# Altium PCB GAN_Synchronous_Buck.PcbDoc
Units mil, origin at the board's own origin, x right, y up, seen from the top; angles counter-clockwise.
Board outline 3937.01 x 2362.2 mil, 2 copper layers (Top Layer, Bottom Layer); 57 components, 22 nets, 161 pads, 193 vias.
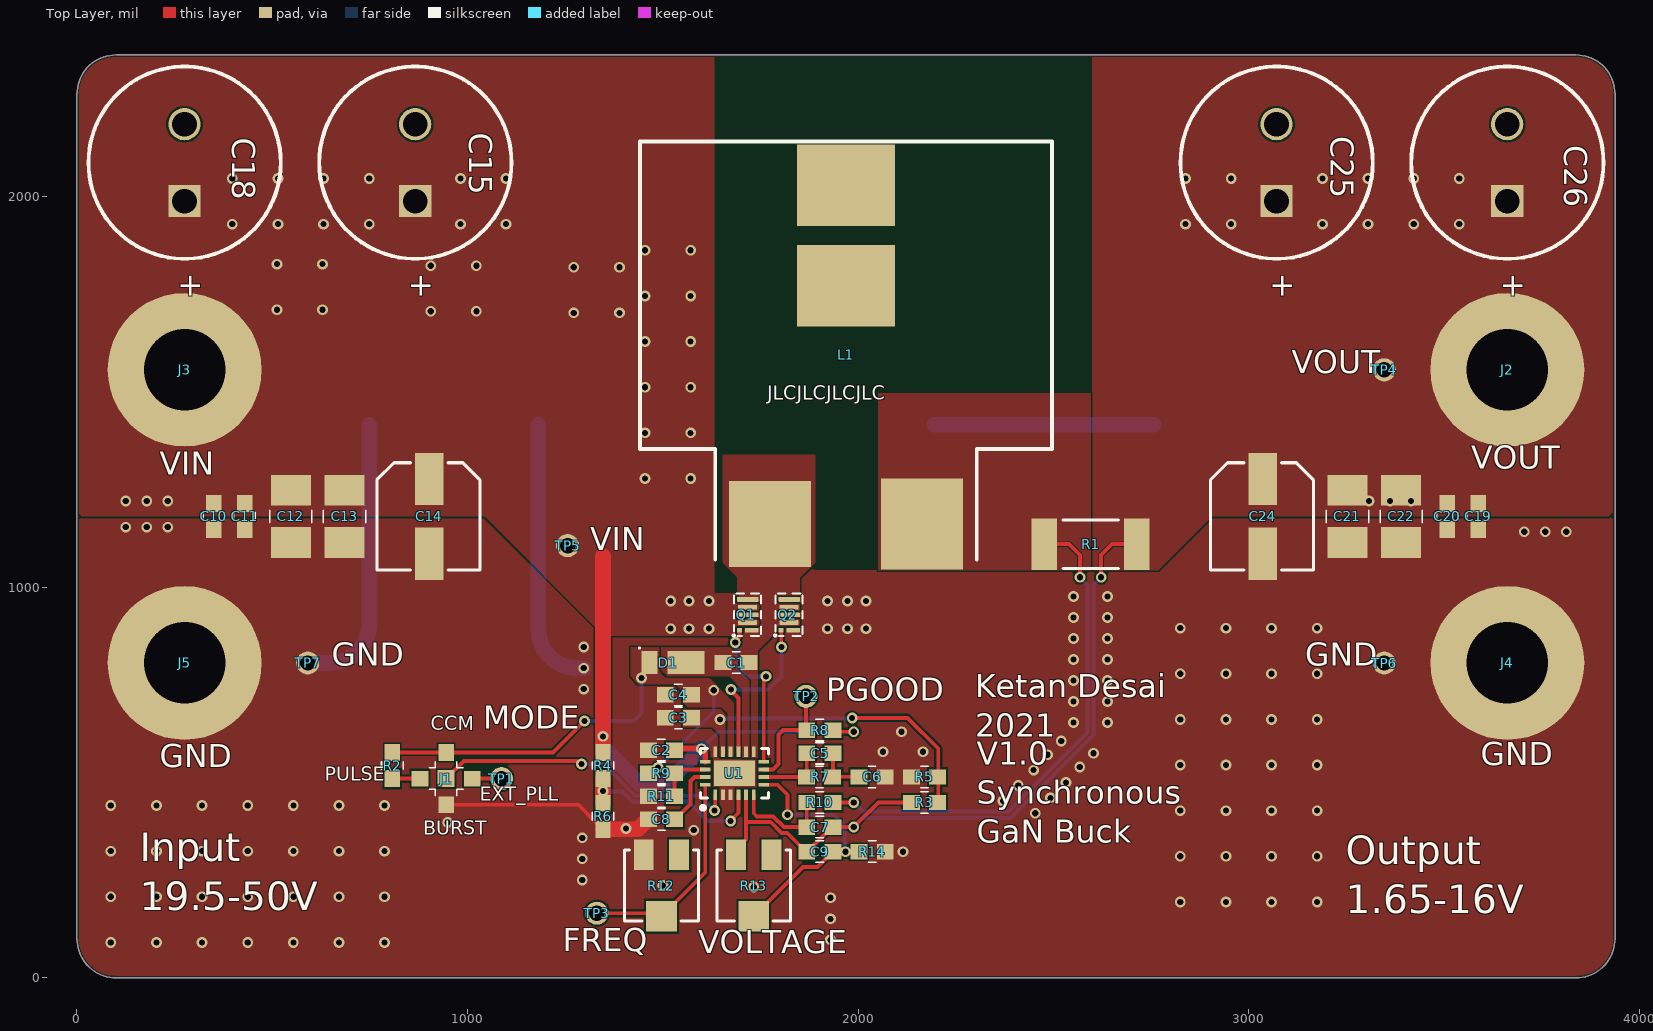
[diagram p0: Top Layer view]
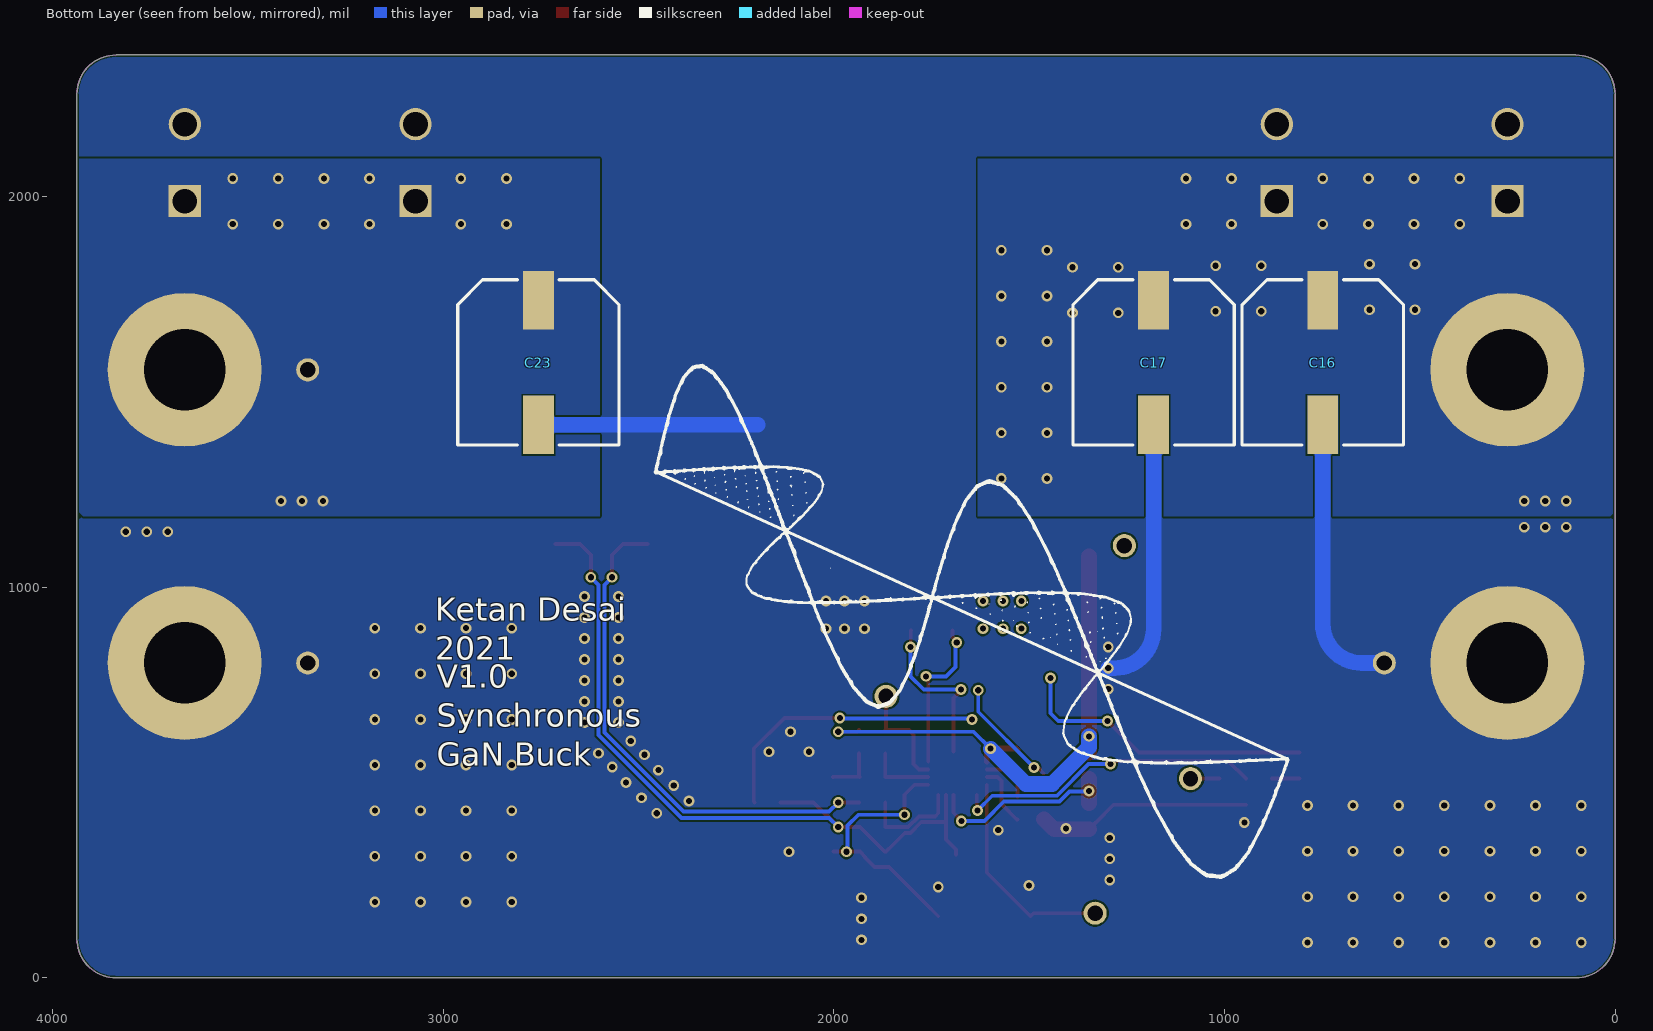
[diagram p1: Bottom Layer view, seen from below]
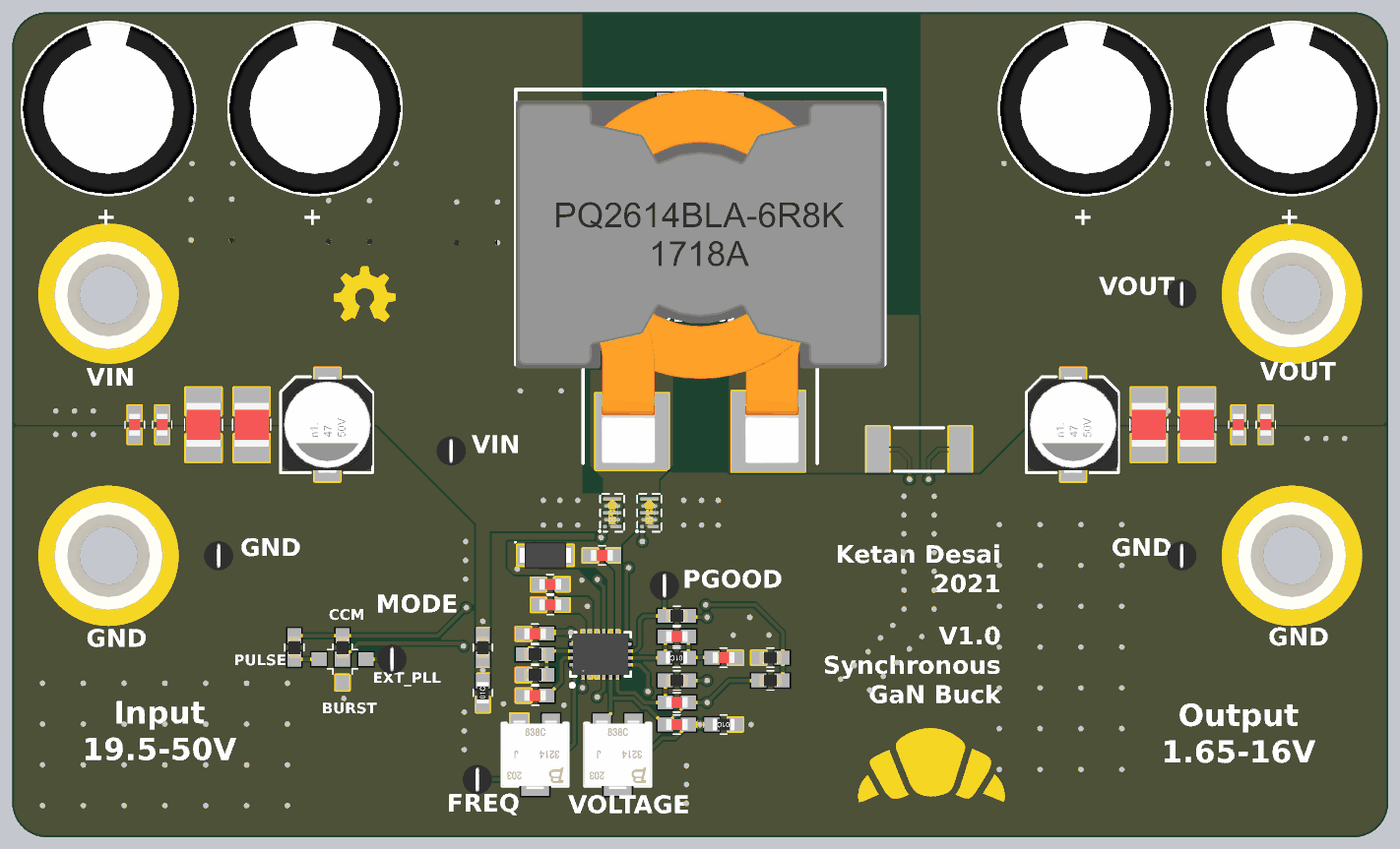
[diagram p2: 3D render of the assembled board from above, using the file's embedded part models]
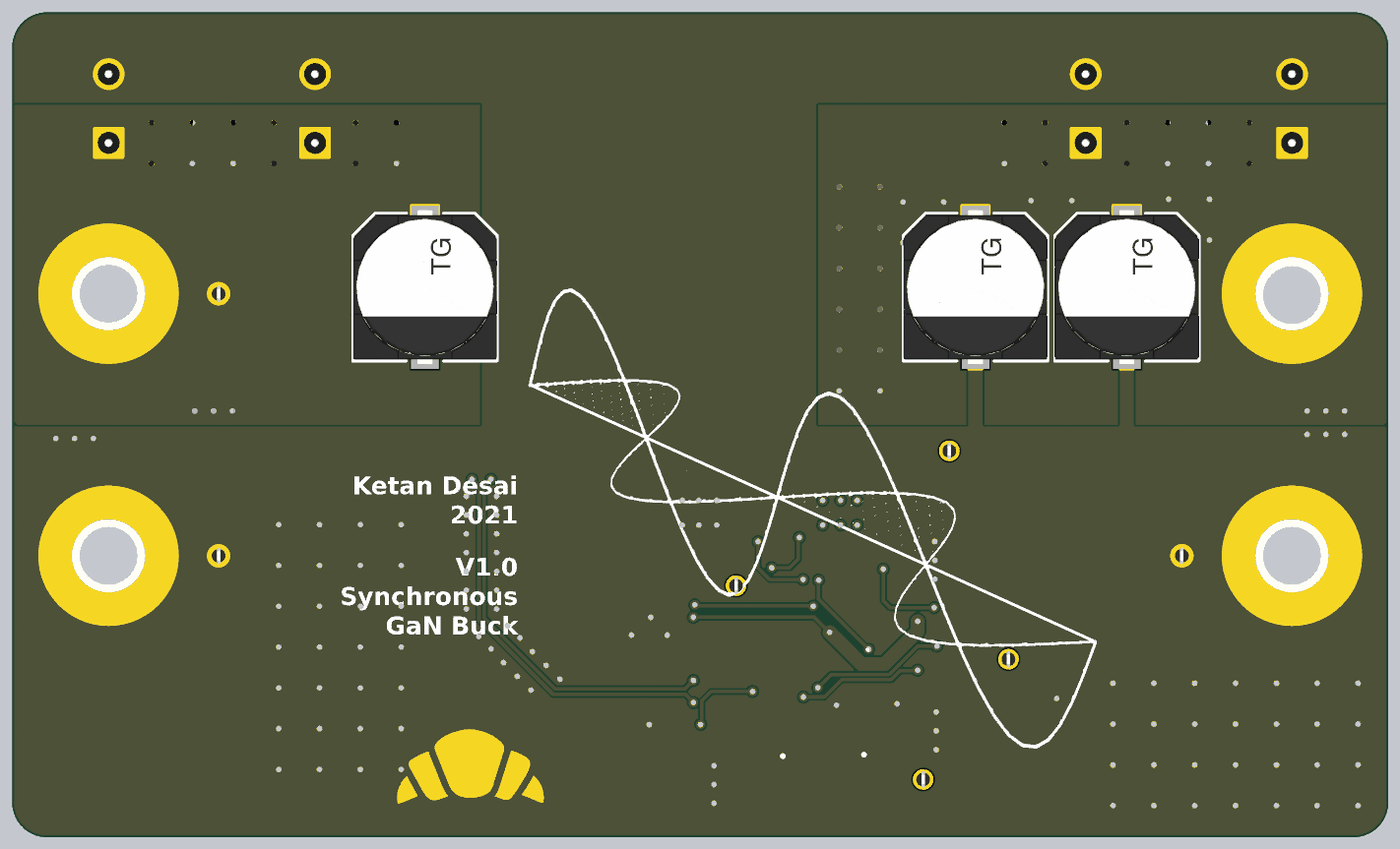
[diagram p3: 3D render of the assembled board from below, using the file's embedded part models]

## Layer stack, top to bottom
Top Solder: solder mask 0.4, Solder Resist, Dk 3.5
Top Layer: signal copper 1.4
Dielectric 1: dielectric 12.6, FR-4, Dk 4.8
Bottom Layer: signal copper 1.4
Bottom Solder: solder mask 0.4, Solder Resist, Dk 3.5

## Board outline
3937.01,2262.2 ccw(c3837.01,2262.2) 3837.01,2362.2 100,2362.2 ccw(c100,2262.2) 0,2262.2 0,100 ccw(c100,100) 100,0 3837.01,0 ccw(c3837.01,100) 3937.01,100

## Design rules (kind name [scope] priority, off if disabled: settings)
Clearance [All] p1: gap=5 ignorepadtopadclearanceinfootprint=FALSE
PlaneClearance [All] p1: clearance=30
PolygonConnect PolygonConnect_5 [All vs IsNamedPolygon('NONET_L-01_P-001')] p1: connectstyle=Direct reliefconductorwidth=15 reliefentries=4 polygonreliefangle="90 Angle" airgapwidth=10
PolygonConnect PolygonConnect_4 [All vs IsNamedPolygon('NONET_L-01_P-001')] p2: connectstyle=Direct reliefconductorwidth=25 reliefentries=4 polygonreliefangle="90 Angle" airgapwidth=10
PolygonConnect PolygonConnect_3 [All vs IsNamedPolygon('NONET_L-01_P-001')] p3: connectstyle=Direct reliefconductorwidth=10 reliefentries=4 polygonreliefangle="90 Angle" airgapwidth=10
PolygonConnect PolygonConnect_2 [All vs IsNamedPolygon('NONET_L-01_P-001')] p4: connectstyle=Direct reliefconductorwidth=10 reliefentries=4 polygonreliefangle="90 Angle" airgapwidth=10
PolygonConnect PolygonConnect_1 [All vs IsNamedPolygon('NONET_L-01_P-001')] p5: connectstyle=Direct reliefconductorwidth=10 reliefentries=4 polygonreliefangle="90 Angle" airgapwidth=10
PolygonConnect [All] p6: connectstyle=Direct reliefconductorwidth=10 reliefentries=4 polygonreliefangle="90 Angle" airgapwidth=10
RoutingVias [All] p1: holewidth=20.12 width=39.37 viastyle="Through Hole" minholewidth=15.75 minwidth=27.56 maxholewidth=27.99 maxwidth=50
SolderMaskExpansion [All] p1: expansion=4 istentingtop=FALSE
Width [All] p1: maxlimit=40 minlimit=5 preferedwidth=10
29 further rules are at their usual default settings.

## Components (designator, comment, footprint, x,y, rotation, side; value= is the part's Value field where it differs from the comment)
C1 "C0603 100nF 50V X7R" C0603-IPC 1687.01,807.09 r0 top value=100nF
C2 "C0603 100nF 50V X7R" C0603-IPC 1496.06,582.68 r180 top value=100nF
C3 "C0603 1uF 50V X7R" C0603-IPC 1539.37,665.35 r0 top value=1uF
C4 "C0603 1uF 50V X7R" C0603-IPC 1539.37,724.41 r180 top value=1uF
C5 "C0603 330pF 50V C0G" C0603-IPC 1901.57,574.8 r180 top value=330pF
C6 "C0603 4.7nF 50V X7R" C0603-IPC 2035.43,514.02 r180 top value=4.7nF
C7 "C0603 3.6nF 50V C0G" C0603-IPC 1901.57,385.83 r180 top value=3.6nF
C8 "C0603 100nF 50V X7R" C0603-IPC 1496.06,405.51 r0 top value=100nF
C9 "C0603 22pF 50V C0G" C0603-IPC 1901.57,322.83 r180 top value=22pF
C10 "C0603 1uF 50V X7R" C0603-IPC 350.39,1181.1 r90 top value=1uF
C11 "C0603 1uF 50V X7R" C0603-IPC 429.13,1181.1 r90 top value=1uF
C12 "C1210 10uF 75V X5R" C1210-IPC 547.24,1181.1 r90 top value=10uF
C13 "C1210 10uF 75V X5R" C1210-IPC 685.04,1181.1 r90 top value=10uF
C14 "UUR1H470MCL6GS" C-SMD-Polarized-6.3x7.7mm 901.57,1181.1 r270 top value=47uF
C15 "35ZLH1000MEFC12.5X20" C-POLARIZED-5-12.5 866.14,2086.61 r270 top value=150uF
C16 "PCE3675CT-ND" C-SMD-Polarized-10x10.2mm 748.03,1574.8 r270 bottom value=33uF
C17 "PCE3675CT-ND" C-SMD-Polarized-10x10.2mm 1181.1,1574.8 r270 bottom value=33uF
C18 "35ZLH1000MEFC12.5X20" C-POLARIZED-5-12.5 275.59,2086.61 r270 top value=560uF
C19 "C0603 1uF 50V X7R" C0603-IPC 3586.61,1181.1 r90 top value=1uF
C20 "C0603 1uF 50V X7R" C0603-IPC 3507.87,1181.1 r90 top value=1uF
C21 "C1210 10uF 75V X5R" C1210-IPC 3251.97,1181.1 r90 top value=10uF
C22 "C1210 10uF 75V X5R" C1210-IPC 3389.76,1181.1 r90 top value=10uF
C23 "PCE3675CT-ND" C-SMD-Polarized-10x10.2mm 2755.91,1574.8 r270 bottom value=33uF
C24 "UUR1H470MCL6GS" C-SMD-Polarized-6.3x7.7mm 3035.43,1181.1 r270 top value=47uF
C25 "35ZLH1000MEFC12.5X20" C-POLARIZED-5-12.5 3070.87,2086.61 r270 top value=150uF
C26 "35ZLH1000MEFC12.5X20" C-POLARIZED-5-12.5 3661.42,2086.61 r270 top value=560uF
D1 "DFLS2100Q-7" "POWERDI 123" 1525.59,807.09 r0 top
J1 "MODE" "4P Jumper" 944.88,509.84 r0 top
J2 "VOUT" "Banana Jack"#1 3661.42,1556.3 r180 top
J3 "VIN" "Banana Jack"#2 275.59,1552.36 r180 top
J4 "GND" "Banana Jack"#1 3661.42,805.91 r180 top
J5 "GND" "Banana Jack"#1 275.59,805.91 r180 top
L1 "PQ2614BLA-6R8K" "PQ2614BLA/BHA Bourns" 1968.5,1726.57 r0 top locked value=6.8uH
Q1 "EPC2055" D0133CT44M 1716.55,929.15 r90 top locked
Q2 "EPC2055" D0133CT44M 1822.87,929.14 r90 top locked
R1 "ERJ-M1WTF1M5U" R2512-IPC 2594.49,1110.24 r0 top value=0R0015
R2 "R0603 100K 1%" R0603-IPC 807.09,543.31 r90 top value=100k
R3 "R0603 0" R0603-IPC 2169.29,448.82 r180 top value=0
R4 "R0603 100K 1%" R0603-IPC 1346.46,543.31 r90 top value=100k
R5 "R0603 0" R0603-IPC 2169.29,514.02 r0 top value=0
R6 "R0603 10K 1%" R0603-IPC-10K 1346.46,413.39 r90 top value=10k
R7 "R0603 10K 1%" R0603-IPC-10K 1900.98,514.02 r180 top value=10k
R8 "R0603 100K 1%" R0603-IPC 1901.57,633.86 r0 top value=100k
R9 "R0603 0" R0603-IPC 1496.06,523.62 r180 top value=0
R10 "R0603 210R 1%" R0603-IPC 1901.57,448.82 r180 top value=210
R11 "R0603 0" R0603-IPC 1496.06,464.57 r0 top value=0
R12 "FREQ" POT4.8-3.5 1496.06,236.22 r270 top value=100k
R13 "VOLTAGE" POT4.8-3.5 1732.28,236.22 r270 top value=200k
R14 "R0603 10K 1%" R0603-IPC-10K 2035.43,322.83 r180 top value=10k
TP1 "EXT_PLL" Testpoint_TH 1086.61,509.84 r180 top
TP2 "PGOOD" Testpoint_TH 1866.14,720.47 r180 top
TP3 "FREQ" Testpoint_TH 1330.71,165.35 r180 top
TP4 "VOUT" Testpoint_TH 3346.46,1556.3 r180 top
TP5 "VIN" Testpoint_TH 1255.91,1106.3 r180 top
TP6 "GND" Testpoint_TH 3346.46,805.75 r180 top
TP7 "GND" Testpoint_TH 590.55,805.91 r180 top
U1 "LTC7800EUDC#PBF" "QFN20 - 3x4MM - ADI" 1683.07,523.62 r90 top locked

## Footprints (in the part's own frame and the unit in brackets; to place one, negate y for a bottom-side part, rotate by r counter-clockwise, add the part's x,y. Pads: shape width x height; smd on the part's side, far side on the other; paste and mask are expansions set on the pad)
"4P Jumper" [mm] "0603 4 Position Jumper"
  rect 1x1.1 smd: 1(0,1.7) 3(0,-1.7)
  rect 1.1x1 smd: 2(1.7,0) 4(-1.7,0)
  rect 1.1x1.1 smd: 5(0,0)
  silkscreen extent -1.1,-1.1 1.1,1.1, body extent -0.43,0.07 0.43,1.62, height 0.44
"Banana Jack"#1 [mm] "JACK NON-INSULATED .350\""
  round 10 hole 5.3: 1(0,0)
  body extent -3.96,-3.96 3.96,3.96, height 2.37
"Banana Jack"#2 [mm] "JACK NON-INSULATED .350\""
  round 10 hole 5.3: 1(0,-0.1)
  body extent -3.96,-3.96 3.96,3.96, height 2.37
C0603-IPC [mm]
  rect 1.1x1 smd: 1(-0.85,0) 2(0.85,0)
  silkscreen extent -0.24,-0.7 0.26,0.7, body extent -0.8,-0.4 0.8,0.4, height 0.3
C1210-IPC [mm] "Chip Capacitor, Body 3.2x2.5mm, IPC High Density"
  rect 2x2.6 smd: 1(-1.7,0) 2(1.7,0)
  silkscreen extent -0.4,-1.38 0.4,1.38, body extent -1.6,-1.25 1.6,1.25, height 0.92
C-POLARIZED-5-12.5 [mm] "Through-hole Capacitor"
  rect 2.1x2.1 hole 1.6: 1(2.5,-0.012)
  round 2.1 hole 1.6: 2(-2.5,-0.012)
  silkscreen extent -6.25,-6.25 6.25,6.25, body extent -6.25,-6.25 6.25,6.25, height 20.1
C-SMD-Polarized-6.3x7.7mm [mm] "Aluminum Electrolytic Capacitor, Body 2.20x6.60x7.70mm, IPC Low Density"
  rect 3.4x1.85 smd: 1(-2.425,0) 2(2.425,0)
  silkscreen extent -3.49,-3.4 3.49,3.29, body extent -3.5,-3.3 3.5,3.3, height 7.7
C-SMD-Polarized-10x10.2mm [mm] "Aluminum Electrolytic Capacitor, IPC Low Density"
  rect 3.8x2 smd: 1(-4.05,0) 2(4.05,0)
  silkscreen extent -5.39,-5.25 5.37,5.25, body extent -5.6,-5.25 5.6,5.24, height 10.54
D0133CT44M [mm] "EPC2055/EPC2204"
  rrect30% 0.301x0.351 smd paste-0.2 mask-0.2: 1(-1,0.525)
  rrect30% 0.301x0.876 smd paste-0.2 mask-0.2: 2(-1,-0.262)
  rrect30% 0.301x1.226 smd paste-0.2 mask-0.2: 3(-0.5,0) 5(0.5,0)
  rrect30% 0.301x1.401 smd paste-0.2 mask-0.2: 4(0,0) 6(1,0)
  rrect50% 0.23x0.805 on Top Solder mask-0.2: ""(-1,-0.262)
  rrect50% 0.23x0.28 on Top Solder mask-0.2: ""(-1,0.525)
  rrect50% 0.23x0.805 on Top Paste mask-0.2: ""(-1,-0.261)
  rrect50% 0.23x0.28 on Top Paste mask-0.2: ""(-1,0.526)
  rrect50% 0.23x1.155 on Top Solder mask-0.2: ""(-0.5,0) ""(0.5,0)
  rrect50% 0.21x1.155 on Top Paste mask-0.2: ""(-0.5,0.001) ""(0.5,0.001)
  rrect50% 0.23x1.33 on Top Solder mask-0.2: ""(0,0) ""(1,0)
  rrect50% 0.21x1.33 on Top Paste mask-0.2: ""(0,0.001) ""(1,0.001)
  silkscreen extent -1.38,-0.87 1.38,0.91, body extent -1.25,-0.75 1.25,0.75, height 0.65
POT4.8-3.5 [mm] "Surface Mount Potentiometer"
  rect 2x1.3 smd: 1(-2,-1.15) 3(-2,1.15)
  rect 2x2 smd: 2(2,0)
  silkscreen extent -2.3,-2.4 2.3,2.4, body extent -2.48,-2.41 2.48,2.41, height 3.72
"POWERDI 123" [mm] "SODFL, 2-Leads, Body 1.78x3.70mm, IPC Low Density"
  rect 2.4x1.5 smd: 1(0.85,0)
  rect 1.05x1.5 smd: 2(-1.525,0)
  silkscreen extent -2.22,0.9 -2.12,1, body extent -1.85,-0.96 1.85,0.96, height 1
"PQ2614BLA/BHA Bourns" [mm] "Bourns PQ2614 Power Inductors"
  rect 5.33x5.59 smd: 1(-4.95,-14.355)
  rect 5.33x5.9 smd: 2(4.95,-14.355)
  rect 6.35x5.28 smd: 3(0,7.68)
  silkscreen extent -13.4,-16.65 13.4,10.53, body extent -13.4,-16.65 13.4,10.52, height 15
"QFN20 - 3x4MM - ADI" [mm] "Analog 20-WFQFN LTC7800"
  rect 0.7x0.25 smd: 1(-1.4,1.25) 2(-1.4,0.75) 3(-1.4,0.25) 4(-1.4,-0.25) 5(-1.4,-0.75) 6(-1.4,-1.25) 11(1.4,-1.25) 12(1.4,-0.75) 13(1.4,-0.25) 14(1.4,0.25) 15(1.4,0.75) 16(1.4,1.25)
  rect 0.25x0.7 smd: 7(-0.75,-1.9) 8(-0.25,-1.9) 9(0.25,-1.9) 10(0.75,-1.9) 17(0.75,1.9) 18(0.25,1.9) 19(-0.25,1.9) 20(-0.75,1.9)
  rect 1.65x2.65 smd: 21(0,0)
  silkscreen extent -2.37,-2.2 1.6,2.2, body extent -1.5,-2 1.5,2, height 0.75
R0603-IPC [mm]
  rect 1.1x1 smd: 1(-0.85,0) 2(0.85,0)
  silkscreen extent -0.25,-0.7 0.25,0.7, body extent -0.77,-0.43 0.78,0.43, height 0.44
R0603-IPC-10K [mm] "10K 0603 Resistor"
  rect 1.1x1 smd: 1(-0.85,0) 2(0.85,0)
  silkscreen extent -0.25,-0.7 0.25,0.7, body extent -0.77,-0.43 0.78,0.43, height 0.44
R2512-IPC [mm] "Chip Resistor, 2-Leads, Body 6.35x3.10mm, IPC Low Density"
  rect 1.65x3.35 smd: 1(-3,0) 2(3,0)
  silkscreen extent -1.8,-1.58 1.8,1.58, body extent -3.27,-1.63 3.27,1.63, height 0.7
Testpoint_TH [mm]
  round 1.5 hole 1: 1(0,0)
  body extent -1.07,-1.07 1.07,1.06, height 4.57

## Part data
C1 C2 C8: "CAP CER 0.1UF 50V X7R 0603", Max. Voltage=50V, Ratings=AEC-Q200, Supplier Part Number 1=490-5798-1-ND, EIA Code=X7R, Features="Soft Termination", Supplier 1=Digi-Key
C3 C4 C10 C11 C19 C20: "CAP CER 1UF 50V X7R 0603", Max. Voltage=50V, EIA Code=X7R
C5: "CAP CER 330PF 50V C0G/NP0 0603", Max. Voltage=50V, EIA Code=C0G
C6: "CAP CER 4700PF 50V X7R 0603", Max. Voltage=50V, Supplier Part Number 1=1276-2066-1-ND, EIA Code=X7R, Features="Soft Termination", Supplier 1=Digi-Key
C7: "Chip Capacitor, 0603, 3.6nF, 50V, X7R", Max. Voltage=50V, Supplier Part Number 1=490-6386-1-ND, EIA Code=C0G, Supplier 1=Digi-Key
C9: "CAP CER 22PF 50V C0G/NP0 0603", Max. Voltage=50V, Supplier Part Number 1=732-7795-1-ND, EIA Code=C0G, Supplier 1=Digi-Key
C12 C13 C21 C22: library part "C1210 10uF 16V X5R", "Chip Capacitor, 1210, 10uF, 75V, X5R", Max. Voltage=75V, Supplier Part Number 1=587-1376-1-ND, EIA Code=X5R, Supplier 1=Digi-Key
C14 C24: library part "C-SMD 47uF 50V Electrolytic", "47uF ±20% 50V SMD,6.3x7.7mm Aluminum Electrolytic Capacitors - SMD", Supplier Part Number 1=493-6230-1-ND, Supplier 1=Digi-Key, Supplier 2=Mouser, Supplier 3=LCSC, Supplier Part Number 2=647-UUR1H470MCL6GS, Supplier Part Number 3=C445227
C15 C18 C25 C26: library part "C-THT 1000uF 35V Electrolytic", "1000uF ±20% 35V 12.5x20 10000Hrs @ 105℃ Radial,12.5x20mm Aluminum Electrolytic Capacitors - Leaded RoHS", Supplier Part Number 1=1189-1888-ND, Supplier 1=Digi-Key, Supplier 2=Mouser, Supplier 3=LCSC, Supplier Part Number 2=232-LH1000MEFC125X20, Supplier Part Number 3=C338194
C16 C17 C23: library part "C-SMD 33uF 80V Electrolytic", "33 µF 80 V Aluminum Electrolytic Capacitors Radial, Can - SMD 1Ohm @ 100kHz 2000 Hrs @ 125°C", Voltage=80V, Supplier 1=Digi-Key, Supplier 2=Mouser, Supplier Part Number 1=PCE3675CT-ND, Supplier Part Number 2=667-EEV-TG1K330P
D1: library part DFLS1100-7, "DIODE SCHOTTKY 100V POWERDI123", Current - Average Rectified (Io)=1A, Current - Reverse Leakage @ Vr="1µA @ 100V", Supplier Part Number 1=DFLS1100DICT-ND, Voltage - DC Reverse (Vr) (Max)=100V, Voltage - Forward (Vf) (Max) @ If="770mV @ 1A", Diode Type=Schottky, Supplier 1=Digi-Key
J1: library part "4P Jumper", "0603 4 Way Solder Jumper"
J2 J3 J4 J5: library part "Banana Jack", "JACK NON-INSULATED .350\"", Supplier Part Number 1=36-575-8-ND, Supplier 1=Digi-Key
L1: library part "Bourns PQ2614BLA-6R8K", "FIXED IND 6.8UH 30A 1.6 MOHM SMD", Saturation Current=26A, Supplier Part Number 1=PQ2614BLA-6R8K-ND, Supplier 1=Digi-Key, Supplier 2=Mouser, Supplier Part Number 2=652-PQ2614BLA-6R8K
Q1 Q2: "GANFET N-CH 40V 29A 3.6mOhm", Supplier Part Number 1=917-EPC2055CT-ND, MFG=EPC, MFGPN=EPC2055, QSGdescript="40V 29A 3.6mE", SchDescript="40V 29A 3.6mE", Supplier 1=Digi-Key
R1: library part "R0805 0R0015 1%", "RES SHUNT, 2512, 0.0015 OHM, 1%,", Supplier Part Number 1=P1.5NDCT-ND, Supplier 1=Digi-Key, Supplier 2=Mouser, Supplier Part Number 2=667-ERJ-M1WTF1M5U
R2 R4 R8: "RES SMD 100K OHM 1% 1/10W 0603", Supplier Part Number 1=RMCF0603FT100KCT-ND, Supplier 1=Digi-Key
R3 R5 R9 R11: "RES SMD 0 OHM JUMPER 1/10W 0603", Supplier Part Number 1=RMCF0603ZT0R00CT-ND, Supplier 1=Digi-Key
R6 R7 R14: "RES SMD 10K OHM 1% 1/10W 0603", Supplier Part Number 1=RMCF0603FT10K0CT-ND, Supplier 1=Digi-Key
R10: "RES 210 OHM 1% 1/10W 0603", Supplier Part Number 1=RMCF0603FT210RCT-ND, Supplier 1=Digi-Key
R12 R13: library part "Trimmer 200k", "200 kOhms 0.25W, 1/4W J Lead Surface Mount Trimmer Potentiometer Cermet 5.0 Turn Side Adjustment", Supplier Part Number 1=3214J-1-204ECT-ND, Supplier 1=Digi-Key, Supplier 2=Mouser, Supplier Part Number 2=652-3214J-1-204E
TP1 TP2 TP3 TP4 TP5 TP6 TP7: library part Testpoint_TH, "Through-hole testpoint hook"
U1: library part LTC7800EUDC, "Synchrnous Buck Regulator Positive Output Step-Down - DC-DC Controller IC 20-QFN (3x4)", Supplier Part Number 1=LTC7800EUDC#PBF-ND, Supplier 1=Digi-Key, Supplier 2=Mouser, Supplier Part Number 2=584-LTC7800EUDCPBF

## Free pads (board coordinates)
  rect 250x207.87 smd: 3(1968.5,1771.65)

## Via types
v1: diameter 27.56, hole 15.75, Top Layer to Bottom Layer, tented both sides, 193 vias

## Nets (pads, with @x,y where several pads share a name; then routed paths per layer and width w, separated by ;. In a path a pad name is that pad's centre, name@x,y a point inside that pad or via, vN(x,y) a via of type N, cw(c..) or ccw(c..) an arc to the next point about the centre after c; other vN are vias at no path point)
BOOST: C1.1 D1.1 U1.12
FREQ: R12.2 TP3.1 U1.20 | length 551.7
  Top Layer w10: TP3.1 1488.19,165.35 R12.2 1608.27,269.69 U1.20
ILIM: R9.1 R11.2 U1.18 | length 141.9
  Top Layer w10: R11.2 R9.1 1539.37,533.46 U1.18
INTVCC: C4.1 D1.2 J1.1 R2.2 R9.2 U1.14 | length 1057.6
  Top Layer w10: R2.2 J1.1 1218.5,576.77 v1(1299.21,657.48) ; R9.2 1477.28,538.31 v1(1487.13,538.31)
  Bottom Layer w10: v1(1299.21,657.48) 1425.2,657.48 1444.88,677.17 v1(1444.88,767.72) ; v1(1487.13,538.31) 1629.92,681.1 v1(1629.92,736.22)
NetC3_2: C3.2 R3.1 R5.2 U1.15 | length 731.9
  Top Layer w10: v1(1984.25,665.35) 2125.98,665.35 2204.72,586.61 2204.72,450.79 R3.1
  Bottom Layer w10: v1(1645.67,661.42) 1647.64,663.39 1982.28,663.39 v1(1984.25,665.35)
NetC5_1: C5.1 C6.2 R7.1 | length 128.2
  Top Layer w10: R7.1 R7.1@1935.04,514.61 ; C5.1 R7.1@1935.04,514.61 ; C6.2 2001.38,514.61 R7.1@1935.04,514.61
NetC5_2: C5.2 R7.2 U1.8 | length 170.8
  Top Layer w10: U1.8 1867.28,513.78 R7.2 1868.11,514.61 C5.2
NetC7_2: C7.2 R10.2 U1.6 | length 260.7
  Top Layer w10: U1.6 1732.28,421.26 1740.16,413.39 1782.03,413.39 1809.59,385.83 C7.2 R10.2
NetC8_2: C8.2 U1.19 | length 158.2
  Top Layer w10: C8.2 1531.5,405.51 1570.87,444.88 1570.87,503.94 1580.71,513.78 U1.19
NetC9_1: C9.1 R13.2 R14.2 U1.7 | length 685.4
  Top Layer w10: R13.2 1766.65,191.85 1826.77,251.97 1858.27,283.46 1895.67,283.46 1918.39,306.18 1918.39,308.15 1933.07,322.83 v1(1967.52,322.83) R14.2@2000,322.83 ; U1.7 1793.31,494.09 1818.9,468.5 v1(1818.9,417.32)
  Bottom Layer w10: v1(1818.9,417.32) 1937.01,417.32 1964.41,389.92 1964.41,325.94 v1(1967.52,322.83)
NetJ1_2: J1.2 TP1.1 | length 74.8
  Top Layer w10: J1.2 TP1.1
NetJ1_4: J1.4 R2.1 | length 70.9
  Top Layer w10: R2.1 J1.4
NetJ1_5: J1.5 U1.1 | length 799.7
  Top Layer w10: J1.5 990.16,555.12 1278.71,555.12 1286.59,547.24 v1(1291.34,547.24) ; v1(1632.05,428.08) 1633.86,429.89 U1.1
  Bottom Layer w10: v1(1291.34,547.24) 1347.34,547.24 1428.52,466.06 1594.06,466.06 v1(1632.05,428.08)
NetQ1_1: Q1.1 U1.10 | length 406.1
  Top Layer w10: v1(1685.04,858.27) 1685.04,861.41 1695.87,872.24 Q1.1 ; U1.10 1757.87,761 1763.78,766.9 v1(1763.78,771.65)
  Bottom Layer w10: v1(1685.04,858.27) 1688.4,854.91 1688.4,795.85 1712.6,771.65 v1(1763.78,771.65)
NetQ2_1: Q2.1 U1.13 | length 428.5
  Top Layer w10: v1(1674.18,738.08) 1674.18,734.85 1692.91,716.11 U1.13 ; Q2.1 1802.67,889.27 1802.67,846.94 v1(1803.15,846.46)
  Bottom Layer w10: v1(1674.18,738.08) 1769.57,738.08 1803.15,771.65 v1(1803.15,846.46)
NetR4_1: R4.1 R6.2 U1.4 | length 496.6
  Top Layer w10: v1(1673.23,401.57) 1673.23,402.9 1692.91,422.59 U1.4
  Top Layer w40: R6.2 v1(1346.46,478.35) R4.1
  Bottom Layer w10: v1(1346.46,478.35) 1347.95,476.85 1396.51,476.85 1422.31,451.06 1564.69,451.06 1614.17,401.57 v1(1673.23,401.57)
PGND: C2.2 C3.1 C4.2 C6.1 C8.1 C10.1 C11.1 C12.1 C13.1 C14.2 C15.2 C16.2 C17.2 C18.2 C19.1 C20.1 C21.1 C22.1 C23.2 C24.2 C25.2 C26.2 J1.3 J4.1 J5.1 Q2.2 Q2.4 Q2.6 R5.1 R6.1 R11.1 R12.1 R14.1 TP6.1 TP7.1 U1.2 U1.3 U1.16 U1.21 | length 2536.5
  Top Layer w10: J1.3 1283.46,442.91 1329.8,396.57 1331.77,396.57 1346.46,381.89 R6.1
  Top Layer w40: R6.1 1435.67,379.92 1461.26,405.51 C8.1
  Bottom Layer w40: TP7.1 648.03,805.91 ccw(c648.03,905.91) 748.03,905.91 C16.2 ; C17.2 1181.1,892.65 ccw(c1281.1,892.65) 1281.1,792.65 v1(1297.24,792.65) ; 2194.88,1415.35 C23.2
  other v1: 86.61,90.55 203.41,90.55 320.21,90.55 437.01,90.55 553.8,90.55 670.6,90.55 787.4,90.55 1929.13,97.11 1929.13,150.92 2824.15,194.23 2940.94,194.23 3057.74,194.23 3174.54,194.23 1929.13,204.72 86.61,207.35 203.41,207.35 320.21,207.35 437.01,207.35 553.8,207.35 670.6,207.35 787.4,207.35 1732.28,232.28 1500,236.22 1293.31,250.66 1293.31,304.46 2824.15,311.02 2940.94,311.02 3057.74,311.02 3174.54,311.02 2114.17,322.83 86.61,324.15 203.41,324.15 320.21,324.15 437.01,324.15 553.8,324.15 670.6,324.15 787.4,324.15 1293.31,358.27 1578.74,377.95 1405.51,381.89 948.82,397.64 2452.76,421.26 2824.15,427.82 2940.94,427.82 3057.74,427.82 3174.54,427.82 86.61,440.94 203.41,440.94 320.21,440.94 437.01,440.94 553.8,440.94 670.6,440.94 787.4,440.94 2370.08,452.76 2492.13,460.63 2409.45,492.13 2531.5,500 2448.82,531.5 2566.93,539.37 2824.15,544.62 2940.94,544.62 3057.74,544.62 3174.54,544.62 2484.25,570.87 2602.36,574.8 2062.99,578.74 2165.35,578.74 2519.68,606.3 2110.24,629.92 2551.18,653.54 2637.8,653.54 2824.15,661.42 2940.94,661.42 3057.74,661.42 3174.54,661.42 2551.18,707.35 2637.8,707.35 1297.24,738.85 2551.18,761.15 2637.8,761.15 2824.15,778.22 2940.94,778.22 3057.74,778.22 3174.54,778.22 2551.18,814.96 2637.8,814.96 1297.24,846.46 2551.18,868.77 2637.8,868.77 1921.26,893.7 1972.44,893.7 2019.68,893.7 2824.15,895.01 2940.94,895.01 3057.74,895.01 3174.54,895.01 2551.18,922.57 2637.8,922.57 1921.26,964.57 1972.44,964.57 2019.68,964.57 2551.18,976.38 2637.8,976.38 3704.72,1141.73 3758.53,1141.73 3812.34,1141.73 124.67,1153.54 178.48,1153.54 232.28,1153.54
PGOOD: R8.1 TP2.1 U1.9 | length 296.6
  Top Layer w10: U1.9 1781.5,533.46 1795.28,547.24 1795.28,622.05 1807.09,633.86 R8.1 1866.14,635.83 TP2.1 TP2.1@1866.14,734.01
SENSE+: L1.2 R1.1 R10.1 | length 1310.4
  Top Layer w10: R10.1 v1(1988.19,448.82) ; R1.1 2539.37,1110.24 2567.34,1082.26 v1(2567.34,1025.25)
  Bottom Layer w10: v1(1988.19,448.82) 2011.81,425.2 2384.3,425.2 2586.61,627.51 2586.61,1005.98 v1(2567.34,1025.25)
SENSE-: C7.1 C9.2 C19.2 C20.2 C21.2 C22.2 C23.1 C24.1 C25.1 C26.1 J2.1 R1.2 R3.2 R13.1 TP4.1 U1.5 | length 1953.6
  Top Layer w10: R13.1 1687.01,328.74 1712.6,354.33 U1.5 ; 1712.6,398.39 1775.81,398.39 1803.37,370.83 1818.15,370.83 1851.46,337.52 1866.14,322.83 1870.08,322.83 1933.07,385.83 C7.1 v1(1988.19,385.83) 2051.18,448.82 R3.2 ; v1(2621.63,1025.25) 2621.63,1082.26 2649.61,1110.24 R1.2
  Bottom Layer w10: v1(1988.19,385.83) 2011.81,409.45 2389.76,409.45 2601.61,621.3 2601.61,1005.23 v1(2621.63,1025.25)
  other v1: 3307.11,1220.49 3360.91,1220.49 3414.72,1220.49 2837.64,1929.13 2954.44,1929.13 3188.03,1929.13 3304.83,1929.13 3421.63,1929.13 3538.43,1929.13 2837.64,2045.93 2954.44,2045.93 3188.03,2045.93 3304.83,2045.93 3421.63,2045.93 3538.43,2045.93
SW: C1.2 L1.1 Q1.2 Q1.4 Q1.6 Q2.3 Q2.5 U1.11
VIN: C2.1 C10.2 C11.2 C12.2 C13.2 C14.1 C15.1 C16.1 C17.1 C18.1 J3.1 Q1.3 Q1.5 R4.2 R8.2 TP5.1 U1.17 | length 1428.7
  Top Layer w10: R8.2 1938.98,629.92 v1(1988.19,629.92)
  Top Layer w15: C2.1 1533.46,586.61 v1(1598.43,586.61) 1608.27,576.77 U1.17
  Top Layer w40: R4.2 v1(1346.46,618.11) 1346.46,1078.74
  Bottom Layer w10: v1(1598.43,586.61) 1641.73,629.92 v1(1988.19,629.92)
  Bottom Layer w40: v1(1346.46,618.11) 1346.46,590.55 1440.94,496.06 1507.87,496.06 v1(1598.43,586.61)
  other v1: 1519.71,893.71 1566.95,893.71 1618.13,893.71 1519.71,964.58 1566.95,964.58 1618.13,964.58 124.67,1220.47 178.48,1220.47 232.28,1220.47 1454.07,1278.22 1570.87,1278.22 1454.07,1395.01 1570.87,1395.01 1454.07,1511.81 1570.87,1511.81 1454.07,1628.61 1570.87,1628.61 1271.65,1702.1 1388.45,1702.1 905.51,1706.04 1022.31,1706.04 511.81,1709.97 628.61,1709.97 1454.07,1745.41 1570.87,1745.41 1271.65,1818.9 1388.45,1818.9 905.51,1822.83 1022.31,1822.83 511.81,1826.77 628.61,1826.77 1454.07,1862.2 1570.87,1862.2 397.64,1929.13 514.44,1929.13 631.23,1929.13 748.03,1929.13 981.63,1929.13 1098.42,1929.13 397.64,2045.93 514.44,2045.93 631.23,2045.93 748.03,2045.93 981.63,2045.93 1098.42,2045.93
pads on no net: L1.3 Q1. Q2. R12.3 R13.3

## Polygon pours and split planes (outlines as drawn)
PGND on Top Layer "NONET_L-01_P-001" (solid, remove dead copper, pour order 14): 0,1181.1 1751.97,1181.1 1889.76,1043.31 2047.24,1043.31 2185.04,1181.1 3937.01,1181.1 3937.01,100 cw(c3837.01,100) 3837.01,0 100,0 cw(c100,100) 0,100
PGND on Top Layer "NONET_L-01_P-001" (solid, pour order 12): 1645.67,452.76 1681.1,452.76 1681.1,488.19 1684.11,491.2 1736.22,491.2 1736.22,552.66 1732.73,556.14 1630.94,556.14 1629.92,555.12 1629.92,491.2 1642.66,491.2 1645.67,488.19
SENSE- on Top Layer "NONET_L-01_P-001" (solid, pour order 11): 3921.26,1181.1 2905.51,1181.1 2767.72,1043.31 2598.43,1043.31 2598.43,2362.2 3837.01,2362.2 cw(c3837.01,2262.2) 3937.01,2262.2 3937.01,1196.85
SENSE+ on Top Layer "NONET_L-01_P-001" (solid, pour order 10): 2051.18,1043.31 2051.18,1496.06 2594.49,1496.06 2594.49,1043.31
PGND on Top Layer "NONET_L-01_P-001" (solid, pour order 9): 1476.38,633.86 1440.94,633.86 1385.83,578.74 1385.83,307.09 1417.32,275.59 1492.13,275.59 1492.13,602.36 1500,610.24
VIN on Top Layer "NONET_L-01_P-001" (solid, remove dead copper, pour order 7): 11.81,1181.1 1043.31,1181.1 1348.43,875.98 1630.88,875.98 1630.88,2362.2 100,2362.2 ccw(c100,2262.2) 0,2262.2 0,1192.91
PGND on Top Layer "NONET_L-01_P-001" (solid, pour order 6): 1476.38,751.97 1531.5,751.97 1551.18,732.28 1551.18,653.54 1562.99,641.73 1625.98,641.73 1645.67,622.05 1645.67,566.93 1625.98,566.93 1625.98,590.55 1606.3,610.24 1500,610.24 1476.38,633.86
NetC3_2 on Top Layer "NONET_L-01_P-001" (solid, pour order 5): 1665.35,566.93 1645.67,566.93 1645.67,622.05 1625.98,641.73 1551.18,641.73 1551.18,688.98 1653.54,688.98 1665.35,677.16
INTVCC on Top Layer "NONET_L-01_P-001" (solid, pour order 4): 1496.06,846.46 1417.32,846.46 1417.32,771.65 1437.01,751.97 1531.5,751.97 1551.18,732.28 1551.18,704.72 1562.99,692.91 1649.6,692.91 1665.35,677.16 1665.35,566.93 1681.39,566.93 1681.39,704.44 1618.11,767.72 1505.91,767.72 1496.06,777.56
BOOST on Top Layer "NONET_L-01_P-001" (solid, pour order 0): 1703.02,562.99 1720.47,562.99 1720.47,759.84 1690.73,789.58 1690.73,828.95 1673.23,846.46 1496.06,846.46 1496.06,787.4 1511.81,771.65 1669.29,771.65 1703.02,737.92
PGND on Top Layer "NONET_L-01_P-001" (solid, pour order 3): 1793.38,984.24 1793.38,875.97 2023.64,875.97 2033.49,885.81 2033.49,974.4 2023.64,984.24
VIN on Top Layer "NONET_L-01_P-001" (solid, pour order 1): 1746.02,984.25 1746.02,875.98 1515.75,875.98 1505.91,885.83 1505.91,974.41 1515.75,984.25
SW on Top Layer "NONET_L-01_P-001" (solid, pour order 2): 1720.47,562.99 1742.13,562.99 1742.13,777.56 1742.13,836.61 1803.89,898.38 1850.39,898.38 1850.39,1023.62 1889.76,1062.99 1889.76,1338.58 1653.54,1338.58 1653.54,1062.99 1690.73,1025.8 1690.73,789.58 1720.47,759.84
PGND on Bottom Layer "NONET_L-01_P-001" (solid, pour order 8): 100,2362.2 ccw(c100,2262.2) 0,2262.2 0,2102.36 3937.01,2102.36 3937.01,2262.2 ccw(c3837.01,2262.2) 3837.01,2362.2
SENSE- on Bottom Layer "NONET_L-01_P-001" (solid, pour order 13): 3921.26,1181.1 2905.51,1181.1 2598.43,1181.1 2598.43,2362.2 3837.01,2362.2 cw(c3837.01,2262.2) 3937.01,2262.2 3937.01,1196.85
PGND on Bottom Layer "NONET_L-01_P-001" (solid, remove dead copper, pour order 16): 0,2262.2 cw(c100,2262.2) 100,2362.2 3837.01,2362.2 cw(c3837.01,2262.2) 3937.01,2262.2 3937.01,100 cw(c3837.01,100) 3837.01,0 100,0 cw(c100,100) 0,100
VIN on Bottom Layer "NONET_L-01_P-001" (solid, remove dead copper, pour order 15): 11.81,1181.1 1043.31,1181.1 1630.88,1181.1 1630.88,2362.2 100,2362.2 ccw(c100,2262.2) 0,2262.2 0,1192.91
no net on Top Solder "NONET_L-01_P-001" (solid): 1036.5,1480.71 1041.95,1486.15 1044.67,1486.15 1065.77,1475.27 1080.74,1491.6 1066.36,1510.3 1074.8,1531.5 1096.63,1535.48 1097.11,1556.19 1073.05,1560.18 1065.24,1580.42 1078.78,1601.38 1064.63,1614.04 1051.96,1607.59 1045.5,1601.63 1023.15,1611.56 1020.67,1629.19 1018.68,1635.15 999.8,1634.66 996.57,1629.69 993.84,1610.81 973.23,1602.37 952.86,1616.03 938.21,1601.38 952.86,1580.02 940.44,1559.65 919.87,1555.98 919.87,1534.17 942,1531.29 950.76,1511.5 939.02,1490.49 952.68,1477 970.02,1486.64 972.12,1488.04 980.35,1484.71 995.06,1520.08 989.46,1525.33 983.68,1531.99 981.05,1542.85 981.93,1554.93 989.98,1565.78 1001.19,1571.91 1010.29,1572.79 1026.58,1567.36 1033.76,1556.85 1036.56,1538.47 1025.35,1523.58 1022.03,1519.91 1036.38,1484.36

## Keep-outs
Keep-Out Layer:
  the board outline again, w0.5

## Other copper
Top Layer:
  pour cut-out: 2681.1,1102.36 2653.54,1102.36 2629.92,1078.74 2629.92,1041.77 2640.41,1031.28 2640.41,1017.48 2629.41,1006.47 2613.86,1006.47 2602.86,1017.48 2602.86,1028.99 2603.79,1028.99 2614.17,1039.37 2614.17,1086.61 2645.67,1118.11 2681.1,1118.11
  pour cut-out: 2507.87,1102.36 2535.43,1102.36 2559.06,1078.74 2559.06,1041.77 2548.56,1031.28 2548.56,1017.48 2559.56,1006.47 2575.12,1006.47 2586.12,1017.48 2586.12,1028.99 2585.18,1028.99 2574.8,1039.37 2574.8,1086.61 2543.31,1118.11 2507.87,1118.11

## Silkscreen, mask and mechanical layers (free items; w line width, h text height)
Top Overlay:
  text "JLCJLCJLCJLC" at 1766.93,1479.53 h35.43
  text "CCM" at 905.51,622.49 h60
  text "Ketan Desai / 2021" at 2299.21,598.43 h100
  text "PULSE" at 633.86,492.57 h60
  text "EXT_PLL" at 1031.5,441.78 h60
  text "BURST" at 885.83,354.77 h60
  text "V1.0 / Synchronous / GaN Buck" at 2303.15,326.77 h100
  text "Input  / 19.5-50V" at 160.26,148.7 h125
  text "Output / 1.65-16V" at 3247.25,141.2 h125
Bottom Overlay:
  drawing of 109 lines, arcs and shapes, not listed
  text "Ketan Desai / 2021" at 3019.68,795.28 h100
  text "V1.0 / Synchronous / GaN Buck" at 3015.75,523.62 h100
Top Solder:
  drawing of 5 lines, arcs and shapes, not listed
Bottom Solder:
  drawing of 5 lines, arcs and shapes, not listed

## Text inside footprints (layer, text, board x,y; h text height)
C15: Top Overlay "+" at 836.61,1804.33 h100 r270
C18: Top Overlay "+" at 246.06,1804.33 h100 r270
C25: Top Overlay "+" at 3041.34,1804.33 h100 r270
C26: Top Overlay "+" at 3631.89,1804.33 h100 r270